# Altium PCB Split_propu2026.PcbDoc
Units mm, origin at the board's own origin, x right, y up, seen from the top; angles counter-clockwise.
Board outline 30.33 x 43.05 mm, 2 copper layers (Top Layer, Bottom Layer); 8 components, 5 nets, 15 pads, 0 vias.
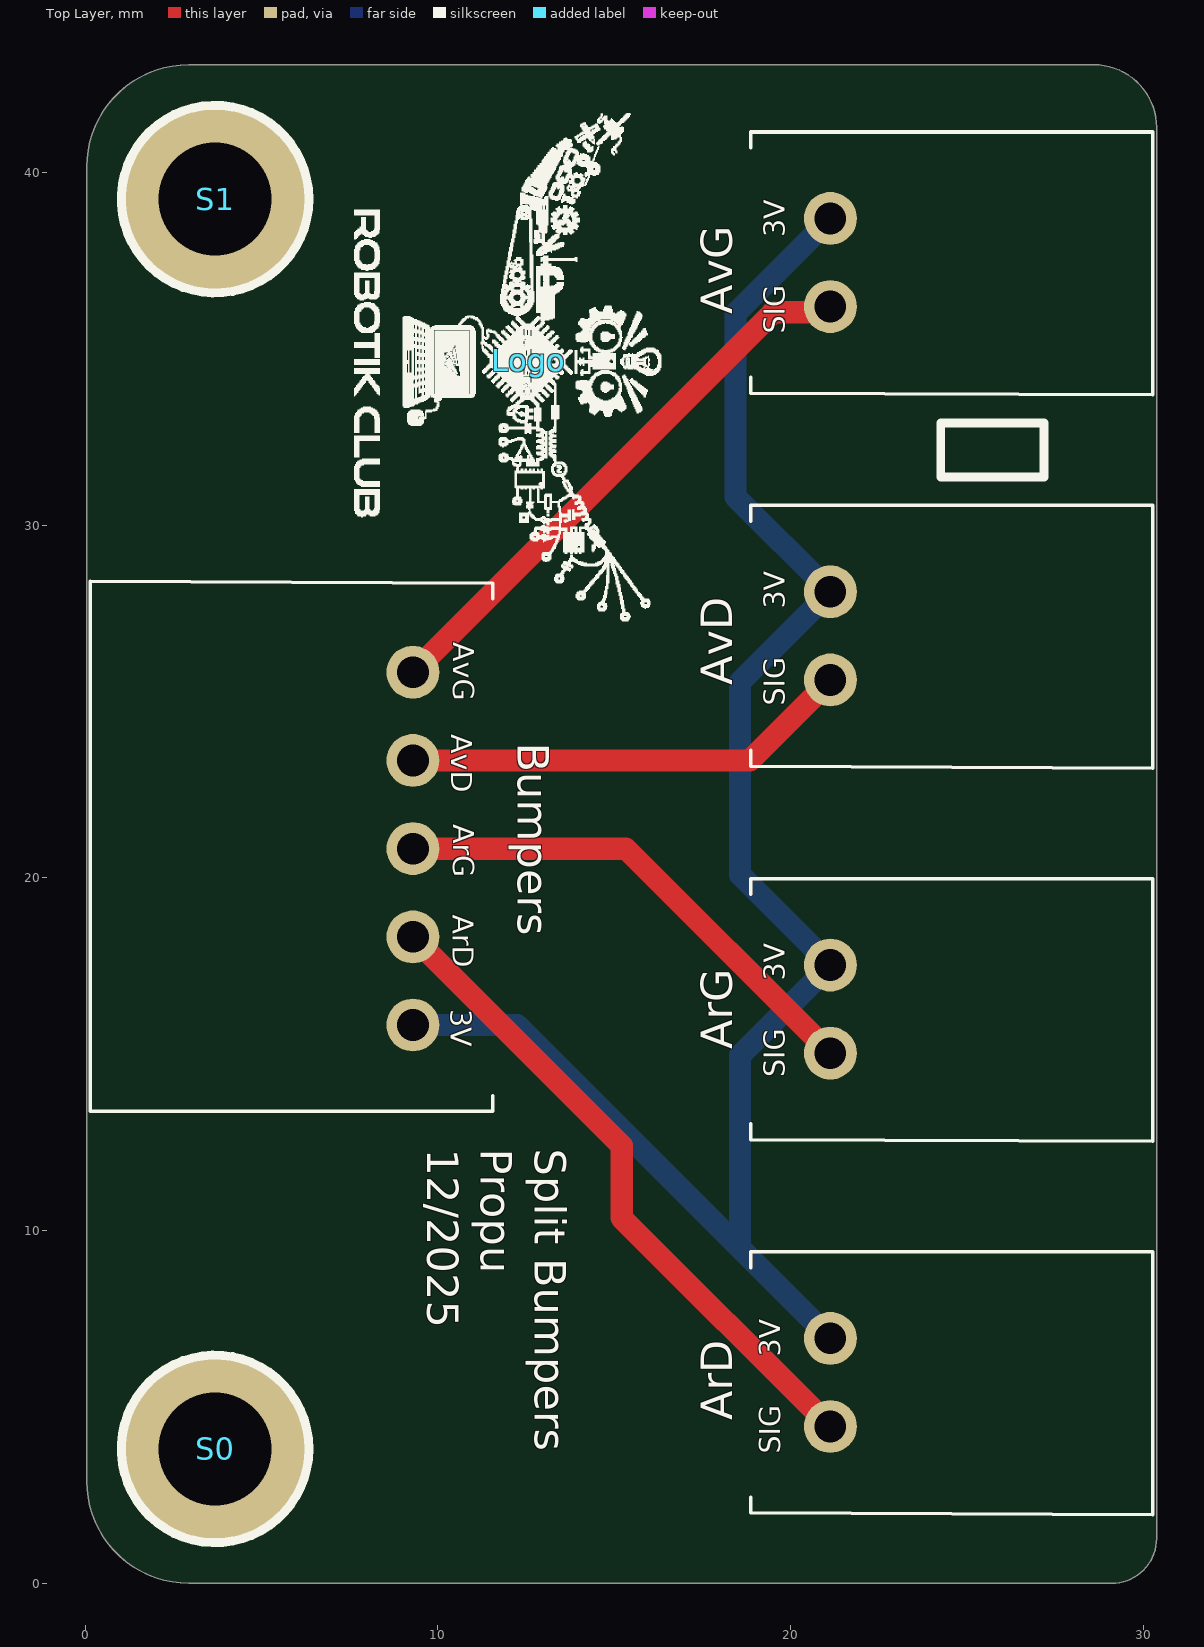
[diagram p0: Top Layer view]
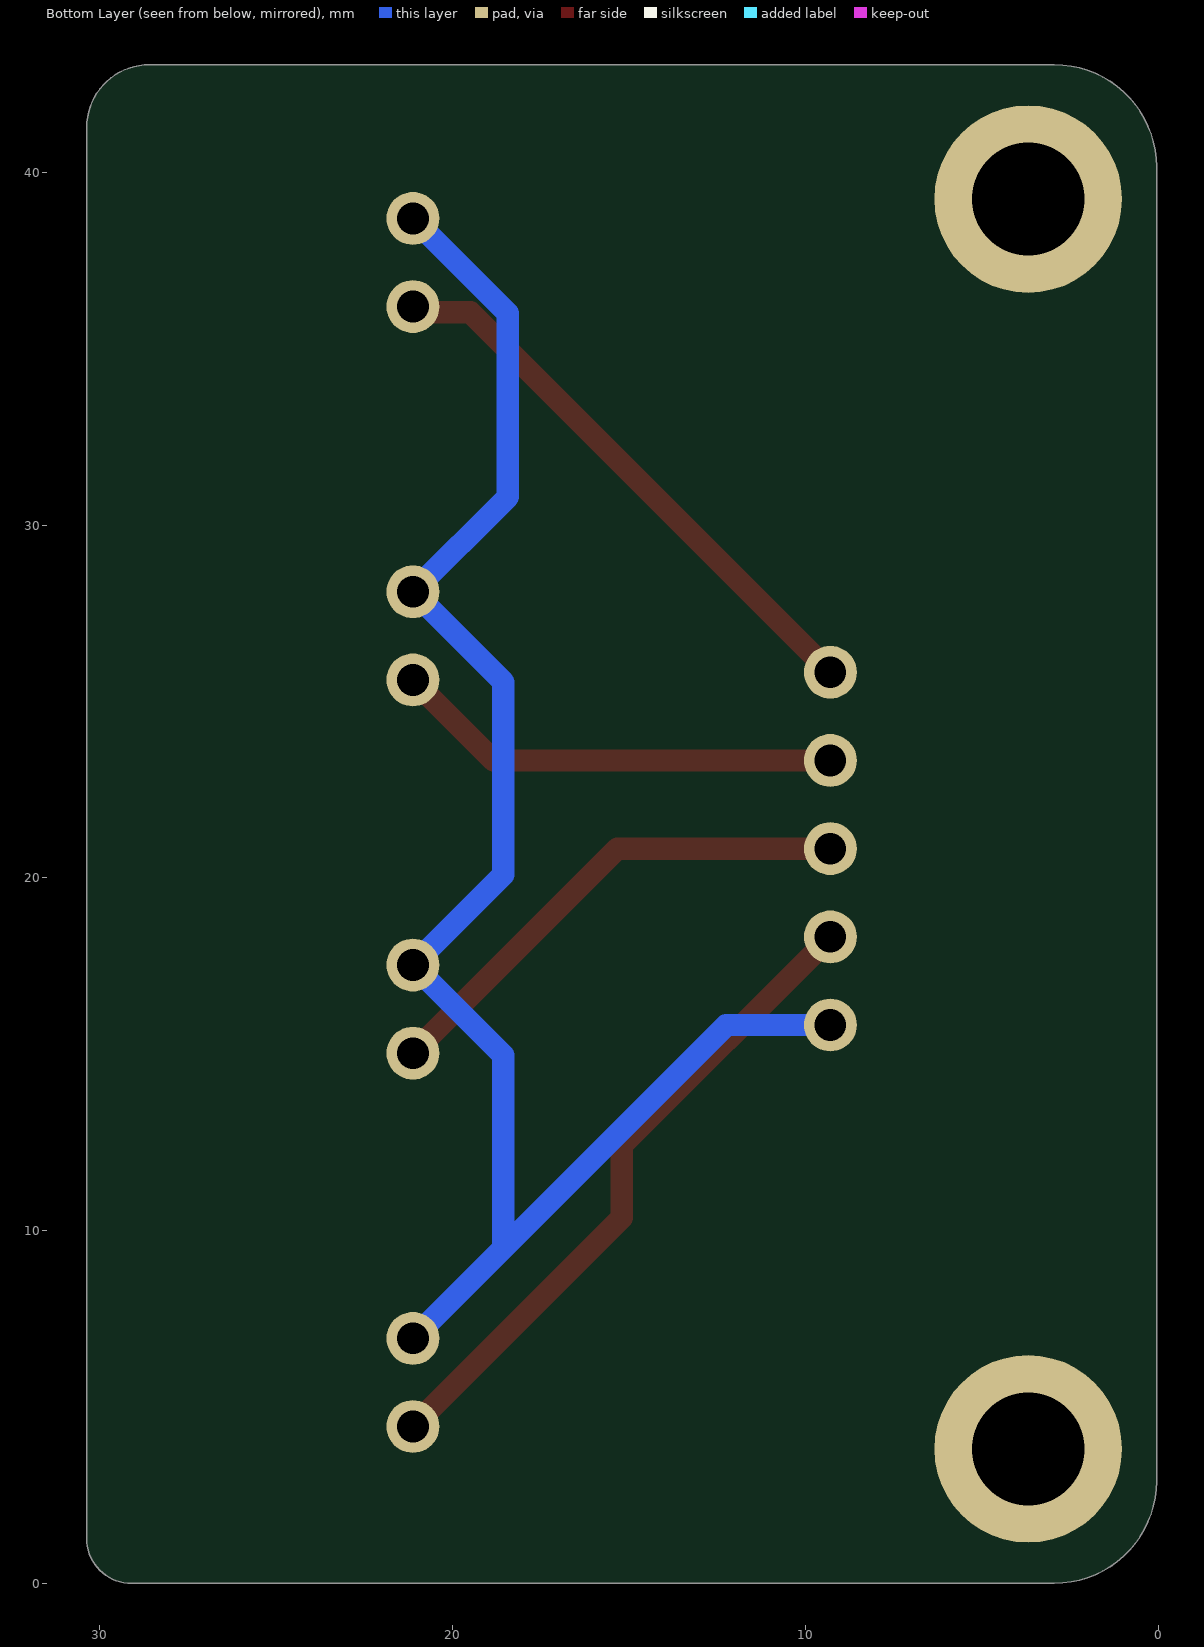
[diagram p1: Bottom Layer view, seen from below]
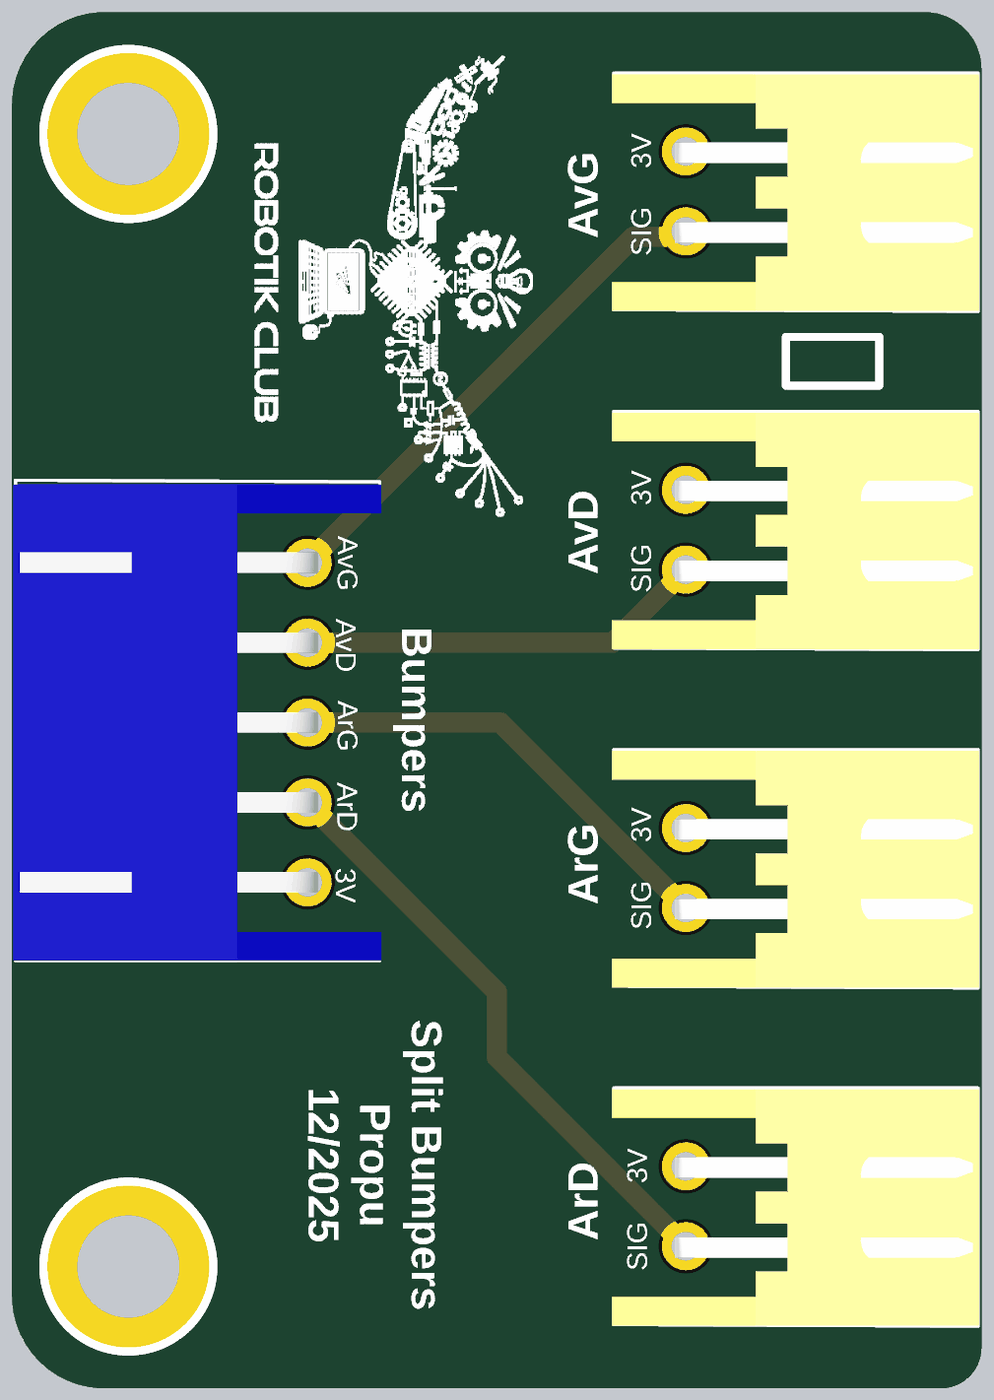
[diagram p2: 3D render of the assembled board from above, using the file's embedded part models]

## Layer stack, top to bottom
Top Solder: solder mask 0.0102, Solder Resist, Dk 3.5
Top Layer: signal copper 0.0356
Dielectric 1: dielectric 0.32, FR-4, Dk 4.8
Bottom Layer: signal copper 0.0356
Bottom Solder: solder mask 0.0102, Solder Resist, Dk 3.5

## Board outline
2.943,0 29.105,0 ccw(c29.105,1.27) 30.375,1.27 30.375,41.275 ccw(c28.597,41.275) 28.597,43.053 2.943,43.053 ccw(c2.943,40.154) 0.044,40.154 0.044,2.899 ccw(c2.943,2.899)

## Design rules (kind name [scope] priority, off if disabled: settings)
Clearance [All] p1: gap=0.254 ignorepadtopadclearanceinfootprint=FALSE
PolygonConnect [All] p1: connectstyle=Relief reliefconductorwidth=0.254 reliefentries=4 polygonreliefangle="90 Angle" airgapwidth=0.254
RoutingVias [All] p1: holewidth=0.711 width=1.27 viastyle="Through Hole" minholewidth=0.711 minwidth=1.27 maxholewidth=0.711 maxwidth=1.27
SolderMaskExpansion [All] p1: expansion=0.102 istentingtop=FALSE
SupplyNets "Schematic Supply Nets" [InNet('3V_L')] p1: voltage=0.000
Width [All] p1: maxlimit=2.54 minlimit=0.254 preferedwidth=0.635 minimp=50.000000 maximp=50.000000 favimp=50.000000
30 further rules are at their usual default settings.

## Classes and differential pairs
component class Split_propu2026: ArD ArG AvD AvG Bumpers S0 S1

## Components (designator, comment, footprint, x,y, rotation, side; value= is the part's Value field where it differs from the comment)
ArD "Header 2H" S2B-XH-A 21.126,6.945 r270 top
ArG "Header 2H" S2B-XH-A 21.126,17.528 r270 top
AvD "Header 2H" S2B-XH-A 21.126,28.112 r270 top
AvG "Header 2H" S2B-XH-A 21.126,38.695 r270 top
Bumpers "Header 5H" S5B-XH-A 9.293,15.828 r90 top
Logo "Comment" Logo_lowres 12.573,34.671 r270 top
S0 "Screw M3" "Screw M3" 3.683,3.81 r0 top
S1 "Screw M3" "Screw M3" 3.683,39.243 r0 top

## Footprints (in the part's own frame and the unit in brackets; to place one, negate y for a bottom-side part, rotate by r counter-clockwise, add the part's x,y. Pads: shape width x height; smd on the part's side, far side on the other; paste and mask are expansions set on the pad)
Logo_lowres [mm]
  silkscreen extent -7.01,-4.93 7.39,3.76
S2B-XH-A [mm]
  round 1.5 hole 0.9: 1(0,0) 2(2.5,0)
  silkscreen extent -2.45,-2.26 5,9.14, body extent -2.41,-2.32 4.99,9.18, height 6.15
S5B-XH-A [mm]
  round 1.5 hole 0.9: 1(0,0) 2(2.5,0) 3(5,0) 4(7.5,0) 5(10,0)
  silkscreen extent -2.45,-2.26 12.58,9.14, body extent -2.45,-2.3 12.45,9.2, height 6.15
"Screw M3" [mm] "M3 iso Screw"
  round 5.32 hole 3.2 unplated: 0(0,0)
  silkscreen extent -2.66,-2.66 2.66,2.66

## Part data
ArD ArG AvD AvG: "Header, 2-Pin, Right Angle", LatestRevisionDate=17-Jul-2002, LatestRevisionNote="Re-released for DXP Platform.", Publisher="Altium Limited"
Bumpers: "Header, 5-Pin, Right Angle", LatestRevisionDate=17-Jul-2002, LatestRevisionNote="Re-released for DXP Platform.", Publisher="Altium Limited"

## Nets (pads, with @x,y where several pads share a name; then routed paths per layer and width w, separated by ;. In a path a pad name is that pad's centre, name@x,y a point inside that pad or via, vN(x,y) a via of type N, cw(c..) or ccw(c..) an arc to the next point about the centre after c; other vN are vias at no path point)
3V_L: ArD.1 ArG.1 AvD.1 AvG.1 Bumpers.1 | length 50.1
  Bottom Layer w0.635: Bumpers.1 12.243,15.828 18.564,9.507 ; ArD.1 18.564,9.507 ; AvG.1 18.437,36.006 18.437,30.801 AvD.1 18.564,25.55 18.564,20.09 ArG.1 18.564,14.966 18.564,9.507
ArD: ArD.2 Bumpers.2 | length 18.8
  Top Layer w0.635: Bumpers.2 15.209,12.411 15.209,10.361 ArD.2
ArG: ArG.2 Bumpers.3 | length 14.2
  Top Layer w0.635: Bumpers.3 15.326,20.828 ArG.2@21.097,15.057
AvD: AvD.2 Bumpers.4 | length 12.8
  Top Layer w0.635: Bumpers.4 18.842,23.328 AvD.2
AvG: AvG.2 Bumpers.5 | length 16.1
  Top Layer w0.635: Bumpers.5 19.494,36.029 20.96,36.029 AvG.2
pads on no net: S0.0 S1.0

## Silkscreen, mask and mechanical layers (free items; w line width, h text height)
Top Overlay:
  lines w0.254: 24.257,31.369 27.178,31.369 27.178,32.893 24.257,32.893 24.257,31.369
  text "3V" at 20.037,38.166 h1.02 r90
  text "SIG" at 20.037,35.426 h1.02 r90
  text "3V" at 20.037,27.625 h1.02 r90
  text "AvG" at 10.233,26.673 h1.02 r270
  text "SIG" at 20.037,24.885 h1.02 r90
  text "AvD" at 10.182,24.076 h1.02 r270
  text "ArG" at 10.233,21.517 h1.02 r270
  text "ArD" at 10.222,18.957 h1.02 r270
  text "3V" at 20.037,17.084 h1.02 r90
  text "3V" at 10.171,16.281 h1.02 r270
  text "SIG" at 20.037,14.344 h1.02 r90
  text "Split Bumpers / Propu / 12/2025" at 9.398,12.317 h1.52 r270
  text "3V" at 19.91,6.416 h1.02 r90
  text "SIG" at 19.91,3.676 h1.02 r90
Mechanical 1:
  lines w0.254: 0,2.54 ccw(c2.959,2.904) 2.286,0 28.829,0 ccw(c29.019,1.333) 30.353,1.143 30.353,41.148 ccw(c28.258,40.957) 28.067,43.053 2.921,43.053 ccw(c2.667,40.386) 0,40.64 0,2.54